# EAGLE board CT_schematic (EAGLE 7.6.0)

Size 100 x 80 mm. Coordinates in mm from the lower left corner, seen from the top.
Outline: 0,0 100,0 100,80 0,80 0,0
Copper layers (1*16): Top 0.035mm / dielectric 1.5mm / Bottom 0.035mm
Design rules "default": minimum track width 10mil, minimum drill 24mil, track to track 8mil, track to pad 8mil, pad to pad 8mil, via to via 8mil, smd to smd 8mil, copper to edge 40mil, drill to drill 8mil, minimum pad ring 10mil, minimum via ring 8mil, stop-mask expansion 4mil, vias tented up to drill 0mil, thermal gap 10mil

## Footprints (pad centres in the part's own frame; a part is rotated, then mirrored left to right if it is on the bottom)
C0603 = smd 0.8 x 0.8: 1 -0.762,0; 2 0.762,0
C0402 = smd 0.5 x 0.5: 1 -0.508,0; 2 0.508,0
C0805 = smd 1.2 x 1.3: 1 -1.016,0; 2 1.016,0
C1206 = smd 1.3 x 1.6: 1 -1.524,0; 2 1.524,0
C1210 = smd 1.2 x 2.5: 1 -1.524,0; 2 1.524,0
EXV-9H = smd 3.505 x 1.676: 1 -2.857,0; 2 2.857,0
L0603 = smd 0.8 x 0.8: 1 -0.762,0; 2 0.762,0
L1210 = smd 1.2 x 2.5: 1 -1.524,0; 2 1.524,0
PJ-037B_PACKAGE = drill 3.7 square: 1 12,0 | drill 3.2 square: 2 6,0
R0603 = smd 0.8 x 0.8: 1 -0.762,0; 2 0.762,0
LQFP64 = smd 0.3 x 1.2: 1 -3.75,-5.75; 2 -3.25,-5.75; 3 -2.75,-5.75; 4 -2.25,-5.75; 5 -1.75,-5.75; 6 -1.25,-5.75; 7 -0.75,-5.75; 8 -0.25,-5.75; 9 0.25,-5.75; 10 0.75,-5.75; 11 1.25,-5.75; 12 1.75,-5.75; 13 2.25,-5.75; 14 2.75,-5.75; 15 3.25,-5.75; 16 3.75,-5.75; 33 3.75,5.75; 34 3.25,5.75; 35 2.75,5.75; 36 2.25,5.75; 37 1.75,5.75; 38 1.25,5.75; 39 0.75,5.75; 40 0.25,5.75; 41 -0.25,5.75; 42 -0.75,5.75; 43 -1.25,5.75; 44 -1.75,5.75; 45 -2.25,5.75; 46 -2.75,5.75; 47 -3.25,5.75; 48 -3.75,5.75 | smd 1.2 x 0.3: 17 5.75,-3.75; 18 5.75,-3.25; 19 5.75,-2.75; 20 5.75,-2.25; 21 5.75,-1.75; 22 5.75,-1.25; 23 5.75,-0.75; 24 5.75,-0.25; 25 5.75,0.25; 26 5.75,0.75; 27 5.75,1.25; 28 5.75,1.75; 29 5.75,2.25; 30 5.75,2.75; 31 5.75,3.25; 32 5.75,3.75; 49 -5.75,3.75; 50 -5.75,3.25; 51 -5.75,2.75; 52 -5.75,2.25; 53 -5.75,1.75; 54 -5.75,1.25; 55 -5.75,0.75; 56 -5.75,0.25; 57 -5.75,-0.25; 58 -5.75,-0.75; 59 -5.75,-1.25; 60 -5.75,-1.75; 61 -5.75,-2.25; 62 -5.75,-2.75; 63 -5.75,-3.25; 64 -5.75,-3.75
TST-110-05-T-D-RA = drill 1 pad 1.7 square: 1 0,0 | drill 1 pad 1.7: 2 0,2.54; 3 2.54,0; 4 2.54,2.54; 5 5.08,0; 6 5.08,2.54; 7 7.62,0; 8 7.62,2.54; 9 10.16,0; 10 10.16,2.54; 11 12.7,0; 12 12.7,2.54; 13 15.24,0; 14 15.24,2.54; 15 17.78,0; 16 17.78,2.54; 17 20.32,0; 18 20.32,2.54; 19 22.86,0; 20 22.86,2.54
SSOP-16 = smd 1.981 x 0.356: 1 -2.464,2.223; 2 -2.464,1.587; 3 -2.464,0.953; 4 -2.464,0.318; 5 -2.464,-0.318; 6 -2.464,-0.953; 7 -2.464,-1.587; 8 -2.464,-2.223; 9 2.464,-2.223; 10 2.464,-1.587; 11 2.464,-0.953; 12 2.464,-0.318; 13 2.464,0.318; 14 2.464,0.953; 15 2.464,1.587; 16 2.464,2.223
182-009-MALE = drill 1.194 pad 1.524 octagon: 1 -5.537,10.923; 2 -2.769,10.923; 3 0,10.923; 4 2.769,10.923; 5 5.537,10.923; 6 -4.153,8.08; 7 -1.384,8.08; 8 1.384,8.08; 9 4.153,8.08 | hole 3.048: -12.446,9.501; 12.446,9.501
AT24C02D = smd 1.6 x 0.6: 1 -2.475,1.905 | smd 1.55 x 0.6: 2 -2.475,0.635; 3 -2.475,-0.635; 4 -2.475,-1.905; 5 2.475,-1.905; 6 2.475,-0.635; 7 2.475,0.635; 8 2.475,1.905
SI7034-A10-IM = smd 0.75 x 0.4: 1 -1,0.5; 2 -1,-0.5; 4 1,-0.5; 5 1,0.5 | smd 0.8 x 1.7: 3 0,0
SMD-8 = smd 0.72 x 0.6: 1 -1.45,-0.7; 2 -0.485,-0.7; 3 0.485,-0.7; 4 1.455,-0.7; 5 1.455,0.7; 6 0.485,0.7; 7 -0.485,0.7; 8 -1.455,0.7
ABS07-32.768KHZ-7-T = smd 1.1 x 2.4: 1 -2.5,0; 2 0,0
ASFL1 = smd 1.7 x 1.5: 1 -1.27,-1.1; 2 1.27,-1.1; 3 1.27,1.1; 4 -1.27,1.1
WSON-8 = smd 0.3 x 0.6: 1 -0.75,0; 2 0.05,0; 3 0.85,0; 4 1.65,0; 5 1.65,3.8; 6 0.85,3.8; 7 0.05,3.8; 8 -0.75,3.8 | smd 3 x 2.6: PAD 0.45,1.9
SON-6 = smd 0.55 x 0.3: 1 -0.355,0.5 | smd 0.52 x 0.3: 2 -0.37,0; 3 -0.37,-0.5; 4 0.37,-0.5; 5 0.37,0; 6 0.37,0.5
DCU0008A_N = smd 0.5 x 0.3: 1 -1.6,0.75; 2 -1.6,0.25; 3 -1.6,-0.25; 4 -1.6,-0.75; 5 1.6,-0.75; 6 1.6,-0.25; 7 1.6,0.25; 8 1.6,0.75
SW_4-1437565-2 = smd 1.4 x 2.1: 1 -2.23,4.55; 2 -2.23,-4.55; 3 2.23,4.55; 4 2.23,-4.55
LGM67K-G1J2-24-Z = smd 0.8 x 1.4: A -2,0; C 0,0
NC7SZ125M5X = smd 1.3 x 0.7: 1 -1.3,0.95; 2 -1.3,0; 3 -1.3,-0.95; 4 1.3,-0.95; 5 1.3,0.95

## Placement (x,y rotation side)
C1  1e-06  [C0603]  -15.24,77.47 0 top  (outside the outline)
C2  1e-07  [C0603]  -19.05,77.47 0 top  (outside the outline)
C3  1e-07  [C0603]  -22.86,77.47 0 top  (outside the outline)
C4  1e-07  [C0603]  -26.67,77.47 0 top  (outside the outline)
C5  1e-07  [C0603]  -30.48,77.47 0 top  (outside the outline)
C6  1e-07  [C0603]  -34.29,77.47 0 top  (outside the outline)
C7  4.7e-06  [C0603]  -74.93,72.39 0 top  (outside the outline)
C8  1e-08  [C0603]  -38.1,77.47 0 top  (outside the outline)
C9  1e-06  [C0603]  -41.91,77.47 0 top  (outside the outline)
C10  1e-11  [C0402]  -45.72,82.55 0 top  (outside the outline)
C11  1e-11  [C0402]  -49.53,82.55 0 top  (outside the outline)
C12  1e-07  [C0402]  -53.34,82.55 0 top  (outside the outline)
C13  1e-07  [C0402]  -57.15,82.55 0 top  (outside the outline)
C14  1e-06  [C0603]  -45.72,77.47 0 top  (outside the outline)
C15  1e-06  [C0603]  -49.53,77.47 0 top  (outside the outline)
C16  2.2e-07  [C0603]  -78.74,72.39 0 top  (outside the outline)
C17  1e-06  [C0603]  -53.34,77.47 0 top  (outside the outline)
C18  1e-06  [C0603]  -57.15,77.47 0 top  (outside the outline)
C19  1e-08  [C0402]  -60.96,82.55 0 top  (outside the outline)
C20  1e-07  [C0402]  -64.77,82.55 0 top  (outside the outline)
C21  1e-06  [C0603]  -60.96,77.47 0 top  (outside the outline)
C22  1e-06  [C0603]  -64.77,77.47 0 top  (outside the outline)
C23  1e-08  [C0402]  -68.58,82.55 0 top  (outside the outline)
C24  1e-06  [C0603]  -68.58,77.47 0 top  (outside the outline)
C25  1e-05  [C0805]  -27.94,66.04 0 top  (outside the outline)
C26  1e-08  [C0402]  -72.39,82.55 0 top  (outside the outline)
C27  1e-05  [C1206]  -72.39,58.42 0 top  (outside the outline)
C28  1e-05  [C1210]  -59.69,58.42 0 top  (outside the outline)
C29  1e-07  [C0402]  -76.2,82.55 0 top  (outside the outline)
C30  0.0001  [EXV-9H]  -72.39,49.53 0 top  (outside the outline)
C31  0.0001  [EXV-9H]  -17.78,59.69 0 top  (outside the outline)
C32  1e-08  [C0402]  -80.01,82.55 0 top  (outside the outline)
C33  1e-07  [C0402]  -15.24,87.63 0 top  (outside the outline)
C34  1e-08  [C0402]  -19.05,87.63 0 top  (outside the outline)
C35  1e-07  [C0402]  -22.86,87.63 0 top  (outside the outline)
C36  1e-08  [C0402]  -26.67,87.63 0 top  (outside the outline)
C37  1e-08  [C0402]  -30.48,87.63 0 top  (outside the outline)
F1  240.0  [L0603]  -72.39,77.47 0 top  (outside the outline)
I1  1e-05  [L1210]  -66.04,58.42 0 top  (outside the outline)
J1  PJ-037B  [PJ-037B_PACKAGE]  -67.31,7.62 0 top  (outside the outline)
R2  1000.0  [R0603]  -76.2,77.47 0 top  (outside the outline)
R4  4700.0  [R0603]  -80.01,77.47 0 top  (outside the outline)
R5  2200.0  [R0603]  -15.24,82.55 0 top  (outside the outline)
R6  2200.0  [R0603]  -19.05,82.55 0 top  (outside the outline)
R9  2200.0  [R0603]  -22.86,82.55 0 top  (outside the outline)
R10  2200.0  [R0603]  -26.67,82.55 0 top  (outside the outline)
R11  10000.0  [R0603]  -68.58,66.04 0 top  (outside the outline)
R12  10000.0  [R0603]  -73.66,66.04 0 top  (outside the outline)
R13  10000.0  [R0603]  -78.74,66.04 0 top  (outside the outline)
R14  10000.0  [R0603]  -15.24,72.39 0 top  (outside the outline)
R15  10000.0  [R0603]  -20.32,72.39 0 top  (outside the outline)
R16  10000.0  [R0603]  -25.4,72.39 0 top  (outside the outline)
R17  10000.0  [R0603]  -30.48,72.39 0 top  (outside the outline)
R18  100000.0  [R0603]  -33.02,66.04 0 top  (outside the outline)
R19  10000.0  [R0603]  -35.56,72.39 0 top  (outside the outline)
R20  10000.0  [R0603]  -40.64,72.39 0 top  (outside the outline)
R21  10000.0  [R0603]  -45.72,72.39 0 top  (outside the outline)
R22  10000.0  [R0603]  -50.8,72.39 0 top  (outside the outline)
R23  10000.0  [R0603]  -55.88,72.39 0 top  (outside the outline)
R24  22.0  [R0603]  -30.48,82.55 0 top  (outside the outline)
R25  100000.0  [R0603]  -38.1,66.04 0 top  (outside the outline)
R26  36000.0  [R0603]  -60.96,72.39 0 top  (outside the outline)
R27  100000.0  [R0603]  -43.18,66.04 0 top  (outside the outline)
R28  100000.0  [R0603]  -48.26,66.04 0 top  (outside the outline)
R29  2231.0  [R0603]  -34.29,82.55 0 top  (outside the outline)
R30  1000.0  [R0603]  -38.1,82.55 0 top  (outside the outline)
R31  10000.0  [R0603]  -66.04,72.39 0 top  (outside the outline)
R32  10000.0  [R0603]  -71.12,72.39 0 top  (outside the outline)
R33  9100.0  [R0603]  -41.91,82.55 0 top  (outside the outline)
R34  680000.0  [R0603]  -53.34,66.04 0 top  (outside the outline)
R35  120000.0  [R0603]  -58.42,66.04 0 top  (outside the outline)
R36  200000.0  [R0603]  -63.5,66.04 0 top  (outside the outline)
U1  STM32F302RET6  [LQFP64]  -24.13,29.21 0 top  (outside the outline)
U2  TST-110-05-T-D-RA  [TST-110-05-T-D-RA]  -64.77,46.99 0 top  (outside the outline)
U3  LTC2804CGN-1#PBF  [SSOP-16]  -66.04,27.94 0 top  (outside the outline)
U4  182-009-113R531  [182-009-MALE]  -36.83,6.35 0 top  (outside the outline)
U5  AT24C02D-SSHM-T  [AT24C02D]  -25.4,40.64 0 top  (outside the outline)
U6  Si7034-A10-IM  [SI7034-A10-IM]  -49.53,86.36 0 top  (outside the outline)
U7  TMD27711  [SMD-8]  -22.86,66.04 0 top  (outside the outline)
U8  ABS07-32.768KHZ-7-T  [ABS07-32.768KHZ-7-T]  -39.37,59.69 0 top  (outside the outline)
U9  ASFL1-25MHZ-NCS  [ASFL1]  -26.67,50.8 0 top  (outside the outline)
U10  LP2951ACSDX/NOPB  [WSON-8]  -64.77,39.37 0 top  (outside the outline)
U11  LP3878SDX-ADJ/NOPB  [WSON-8]  -46.99,39.37 0 top  (outside the outline)
U12  TPS3895ADRYR  [SON-6]  -53.34,86.36 0 top  (outside the outline)
U13  LSF0102DCTR  [DCU0008A_N]  -43.18,86.36 0 top  (outside the outline)
U14  4-1437565-2  [SW_4-1437565-2]  -45.72,27.94 0 top  (outside the outline)
U15  Q65110A2395  [LGM67K-G1J2-24-Z]  -48.26,58.42 0 top  (outside the outline)
U16  nc7sz125m5x  [NC7SZ125M5X]  -77.47,57.15 0 top  (outside the outline)
U17  nc7sz125m5x  [NC7SZ125M5X]  -15.24,66.04 0 top  (outside the outline)

## Library data of the parts
C1-C37 F1 I1 J1 R2 R4-R6 R9-R36 U1-U17 = circuit_tree

## Nets
CLK_CRYSTAL_U1_3: C10.1 U1.3 U8.1
CLK_CRYSTAL_U1_4: C11.1 U1.4 U8.2
CLK_U1_5: U1.5 U9.3
GND: C1.2 C2.2 C3.2 C4.2 C5.2 C6.2 C7.2 C8.2 C9.2 C10.2 C11.2 C12.2 C13.2 C14.2 C15.2 C17.2 C18.2 C19.2 C20.2 C21.2 C22.2 C23.2 C24.2 C25.2 C26.2 C27.2 C28.2 C29.2 C30.2 C31.2 C32.2 C33.2 C34.2 C35.2 C36.2 C37.2 J1.2 R2.2 R11.2 R17.2 R19.2 R21.2 R22.2 R27.2 R30.2 R33.2 R35.2 U1.12 U1.18 U1.31 U1.47 U1.63 U2.4 U2.6 U2.8 U2.10 U2.12 U2.14 U2.16 U2.18 U2.20 U3.8 U4.5 U5.4 U6.5 U7.3 U9.2 U10.3 U10.4 U10.PAD U11.3 U11.PAD U12.2 U13.1 U15.C U16.2 U16.3 U17.1 U17.3
NET_U1_6: U13.4
NET_U1_7: R4.1 U1.7 U17.4
NET_U1_13: C8.1 C9.1 F1.1 U1.13
NET_U1_40: R10.1 U1.40 U5.5
NET_U1_41: R9.1 U1.41 U5.6
NET_U1_43: U13.3
NET_U1_58: R5.1 U1.58 U7.2
NET_U1_59: R6.1 U1.59 U7.8
NET_U1_60: R11.1 U1.60
NET_U1_61: U15.A
NET_U1_62: U14.3 U14.4
NET_U2_19: R17.1 U2.19
NET_U3_6: C14.1 U3.6
NET_U3_7: C16.1 I1.2 U3.7
NET_U3_9: C15.1 U3.9
NET_U3_10: C16.2 U3.10
NET_U3_11: R18.1 U3.11
NET_U4_2: U3.1 U4.2
NET_U4_3: U3.3 U4.3
NET_U4_7: U3.2 U4.7
NET_U4_8: U3.4 U4.8
NET_U5_1: R20.1 U5.1
NET_U5_2: R21.1 U5.2
NET_U5_3: R22.1 U5.3
NET_U5_7: R19.1 U5.7
NET_U7_4: C22.1 R24.1 U7.4
NET_U7_5: U7.5
NET_U7_6: U7.6
NET_U7_7: R23.1 U7.7
NET_U10_5: R25.1 U10.5
NET_U10_7: R26.2 R27.1 U10.7
NET_U11_1: C26.1 U11.1
NET_U11_6: R29.2 R30.1 U11.6
NET_U11_8: R28.1 U11.8
NET_U12_1: R32.1 R33.1 U12.1
NET_U12_3: R34.2 R35.1 U12.3
NET_U12_4: R31.1 U12.4 U16.4 U17.2
NET_U13_8: R36.1 U13.8
NET_U14_1: R2.1 U14.1 U14.2
PROC_I2C2_SCL_TOXCVR: U6.2 U13.5
PROC_I2C2_SDA_TOXCVR: U6.4 U13.6
PROC_SYS_JTCK_SWCLK: R15.1 U1.49 U2.9
PROC_SYS_JTDI: R13.1 U1.50 U2.5
PROC_SYS_JTDO_TRACESWO: U1.55 U2.13
PROC_SYS_JTMS_SWDIO: R14.1 U1.46 U2.7
PROC_SYS_NJTRST: R12.1 U1.56 U2.3
PROC_UART4_RX: U1.52 U3.16
PROC_UART4_TX: U1.51 U3.14
RST_OUT_U2_SRESET_B: R16.1 U2.15 U16.1
VCC_S1_8V2: C24.1 C27.1 C30.1 C31.1 J1.1 R28.2 U10.8 U11.4
VCC_TIER1_1V8: C17.1 C20.1 C25.1 C32.1 C33.1 C36.1 C37.1 I1.1 R18.2 R25.2 R26.1 R36.2 U3.5 U6.1 U10.1 U13.7 U16.5 U17.5
VCC_TIER1_3V3: C1.1 C2.1 C3.1 C4.1 C5.1 C6.1 C7.1 C12.1 C13.1 C18.1 C19.1 C21.1 C23.1 C28.1 C29.1 C34.1 C35.1 F1.2 R4.2 R5.2 R6.2 R9.2 R10.2 R12.2 R13.2 R14.2 R15.2 R16.2 R20.2 R23.2 R24.2 R29.1 R31.2 R32.2 R34.1 U1.1 U1.19 U1.32 U1.48 U1.64 U2.1 U2.2 U3.12 U5.8 U7.1 U9.4 U11.5 U12.6 U13.2

## Tracks (layer width: path | path; a pad name or v marks a point on that pad's centre or on a via)
CLK_CRYSTAL_U1_3  (2 unrouted)
CLK_CRYSTAL_U1_4  (2 unrouted)
CLK_U1_5  (1 unrouted)
GND  (78 unrouted)
NET_U1_7  (2 unrouted)
NET_U1_13  (3 unrouted)
NET_U1_40  (2 unrouted)
NET_U1_41  (2 unrouted)
NET_U1_58  (2 unrouted)
NET_U1_59  (2 unrouted)
NET_U1_60  (1 unrouted)
NET_U1_62  (1 unrouted)
NET_U2_19  (1 unrouted)
NET_U3_6  (1 unrouted)
NET_U3_7  (2 unrouted)
NET_U3_9  (1 unrouted)
NET_U3_10  (1 unrouted)
NET_U3_11  (1 unrouted)
NET_U4_2  (1 unrouted)
NET_U4_3  (1 unrouted)
NET_U4_7  (1 unrouted)
NET_U4_8  (1 unrouted)
NET_U5_1  (1 unrouted)
NET_U5_2  (1 unrouted)
NET_U5_3  (1 unrouted)
NET_U5_7  (1 unrouted)
NET_U7_4  (2 unrouted)
NET_U7_7  (1 unrouted)
NET_U10_5  (1 unrouted)
NET_U10_7  (2 unrouted)
NET_U11_1  (1 unrouted)
NET_U11_6  (2 unrouted)
NET_U11_8  (1 unrouted)
NET_U12_1  (2 unrouted)
NET_U12_3  (2 unrouted)
NET_U12_4  (3 unrouted)
NET_U13_8  (1 unrouted)
NET_U14_1  (2 unrouted)
PROC_I2C2_SCL_TOXCVR  (1 unrouted)
PROC_I2C2_SDA_TOXCVR  (1 unrouted)
PROC_SYS_JTCK_SWCLK  (2 unrouted)
PROC_SYS_JTDI  (2 unrouted)
PROC_SYS_JTDO_TRACESWO  (1 unrouted)
PROC_SYS_JTMS_SWDIO  (2 unrouted)
PROC_SYS_NJTRST  (2 unrouted)
PROC_UART4_RX  (1 unrouted)
PROC_UART4_TX  (1 unrouted)
RST_OUT_U2_SRESET_B  (2 unrouted)
VCC_S1_8V2  (7 unrouted)
VCC_TIER1_1V8  (17 unrouted)
VCC_TIER1_3V3  (48 unrouted)